# Altium PCB PCB1.PcbDoc
Units mm, origin at the board's own origin, x right, y up, seen from the top; angles counter-clockwise.
Board outline 24 x 17 mm, 4 copper layers (Top Layer, Int1 (GND), Int2 (PWR), Bottom Layer), stack 1.586 mm thick; 2 components, 14 nets, 48 pads, 22 vias.
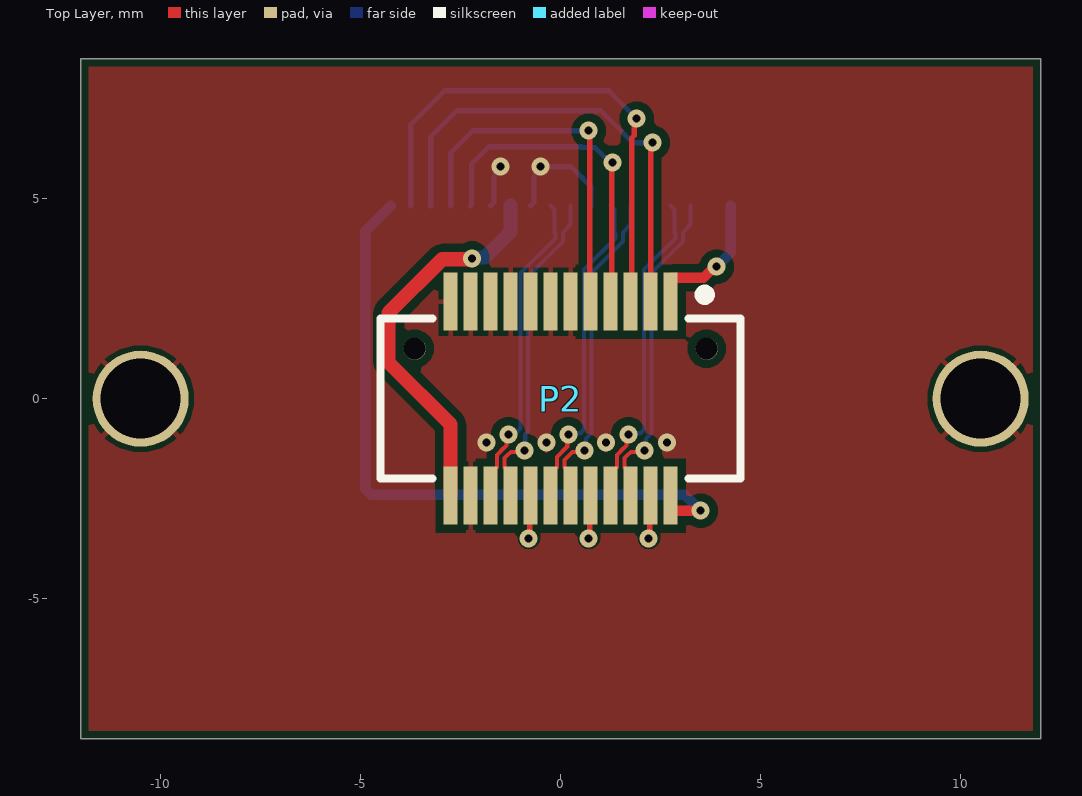
[diagram p0: Top Layer view]
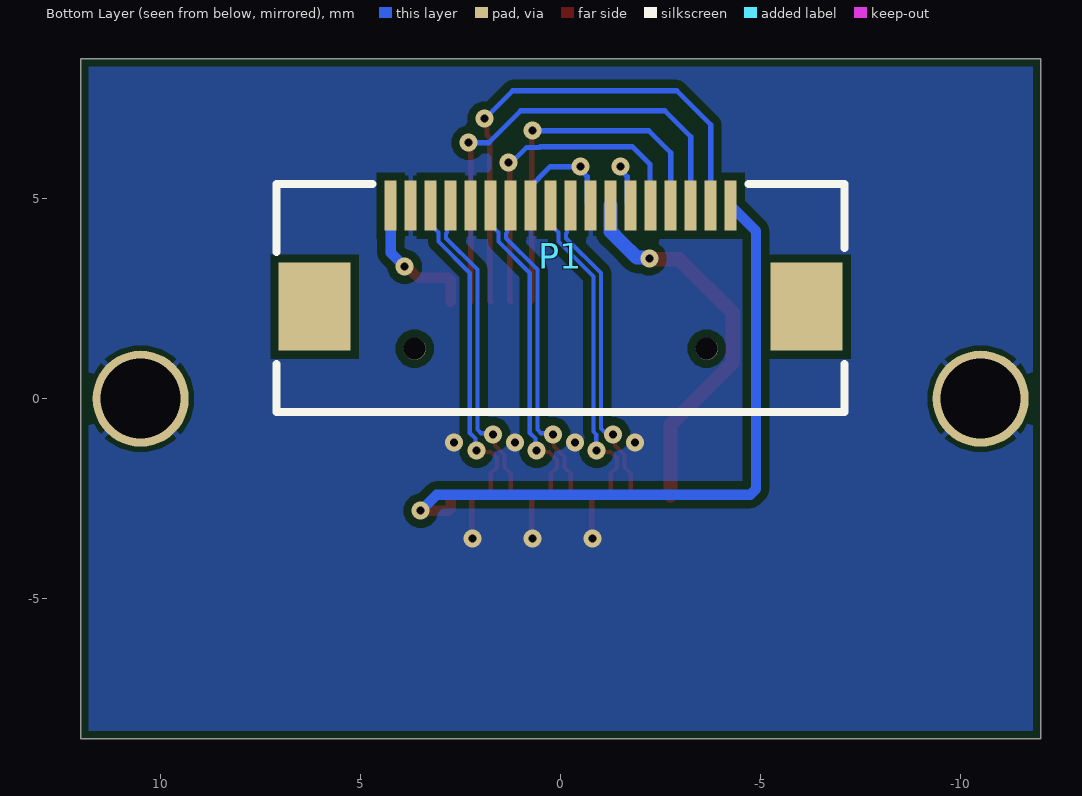
[diagram p1: Bottom Layer view, seen from below]
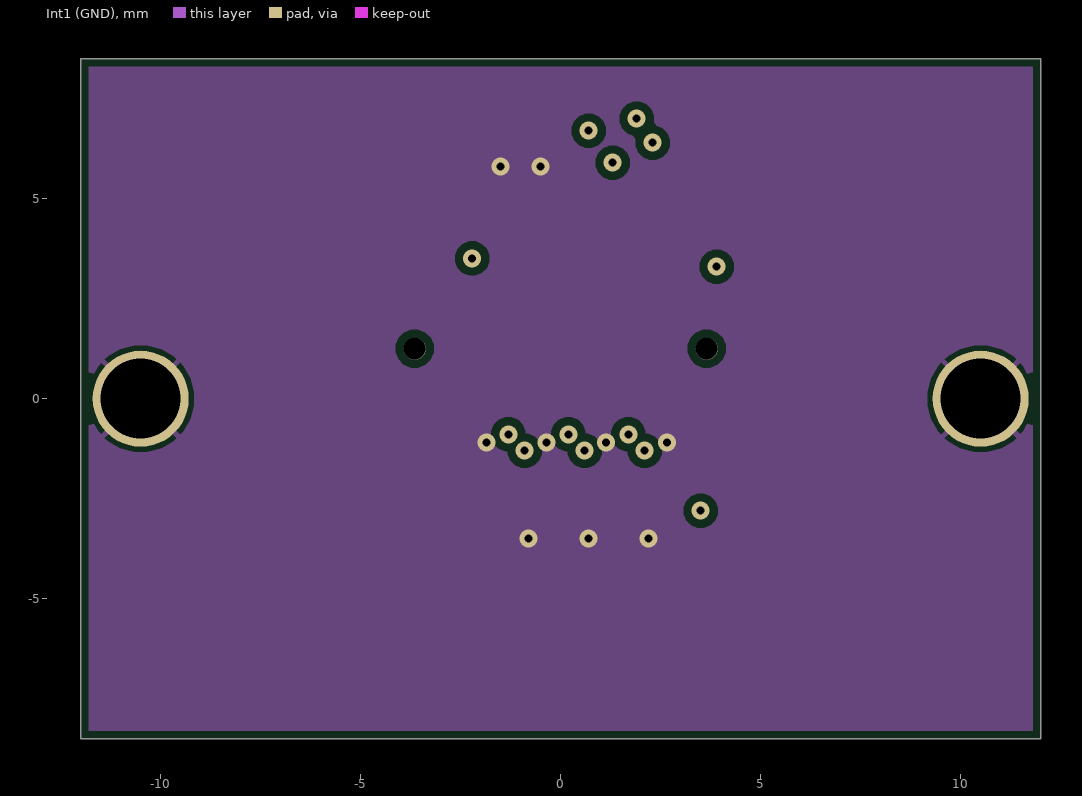
[diagram p2: Int1 (GND)]
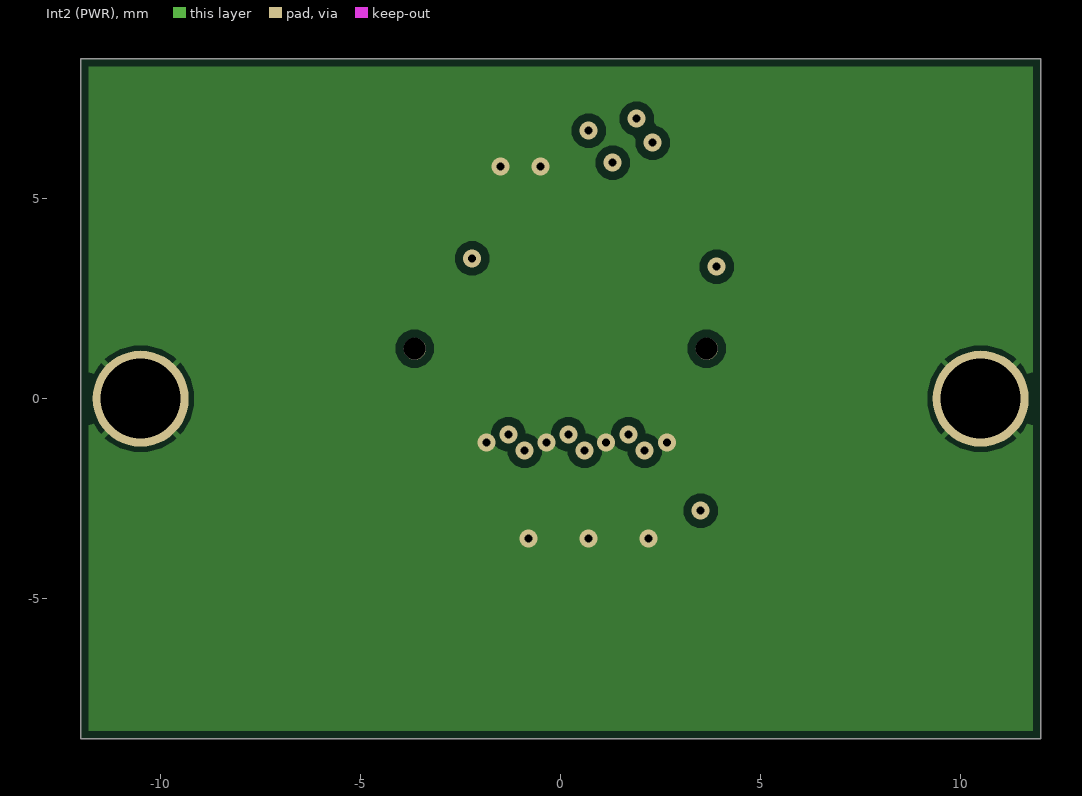
[diagram p3: Int2 (PWR)]

## Layer stack, top to bottom
Top Solder: solder mask 0.0152, SM-001, Dk 3.8
Top Layer: signal copper 0.035
Dielectric 1: prepreg 0.2104, PP-017, Dk 4.5
Int1 (GND): signal copper 0.0152
Dielectric 2: core 1.065, Core-039, Dk 4.48
Int2 (PWR): signal copper 0.0152
Dielectric 3: prepreg 0.2104, PP-017, Dk 4.5
Bottom Layer: signal copper 0.035
Bottom Solder: solder mask 0.0152, SM-001, Dk 3.8

## Board outline
-12,-8.5 12,-8.5 12,8.5 -12,8.5

## Design rules (kind name [scope] priority, off if disabled: settings)
BoardOutlineClearance [All] p1: gap=0.2 ignorepadtopadclearanceinfootprint=FALSE except(0.4: Arc-SplitBarrior Arc-SplitContinuation Track-SplitBarrior Track-SplitContinuation SMDPad-SplitBarrior SMDPad-SplitContinuation THPad-SplitBarrior THPad-SplitContinuation Via-SplitBarrior Via-SplitContinuation Fill-SplitBarrior Fill-SplitContinuation Poly-SplitBarrior Poly-SplitContinuation Region-SplitBarrior Region-SplitContinuation Text-SplitBarrior Text-SplitContinuation)
Clearance [All] p1: gap=0.2 ignorepadtopadclearanceinfootprint=FALSE except(0: Arc-Text Track-Text SMDPad-Text THPad-Text Via-Text Fill-Text Poly-Text Region-Text Text-Text; 0.089: Arc-Arc Arc-Track Arc-SMDPad Track-Track Track-SMDPad SMDPad-SMDPad; 0.127: Arc-Via Track-Via SMDPad-Via THPad-Via Via-Via)
DiffPairsRouting [InDifferentialPairClass('MIPI')] p1: maxlimit=0.127 minlimit=0.089 mostfreqgap=0.127 toplayer_maxgap=0.089 toplayer_prefgap=0.089 toplayer_minwidth=0.102 toplayer_maxwidth=0.102 toplayer_prefwidth=0.102 midlayer1_mingap=0.127 midlayer1_minwidth=0.11 midlayer1_maxwidth=0.11 midlayer1_prefwidth=0.11 midlayer2_mingap=0.127 midlayer2_minwidth=0.11 midlayer2_maxwidth=0.11 midlayer2_prefwidth=0.11 bottomlayer_maxgap=0.089 bottomlayer_prefgap=0.089 bottomlayer_minwidth=0.102 bottomlayer_maxwidth=0.102 bottomlayer_prefwidth=0.102 impedanceprofiledriven=TRUE impedanceprofileid={6F539A65-77A7-435E-BA13-085AFFFAEF97} impedanceprofilevalue=100.000000 maxuncoupledlength=12.7
HoleSize [All] p1: absolutevalues=TRUE maxlimit=6.3 minlimit=0.2 maxpercent=80.000 minpercent=20.000
MatchedLengths MatchedLengths_1 [InDifferentialPairClass('MIPI')] p1: tolerance=25.4 checknetsindiffpair=FALSE checkdiffpairvsdiffpair=TRUE checkxsignals=TRUE checkothers=TRUE usedelayunits=TRUE delaytolerance=1.000000
MatchedLengths [InDifferentialPairClass('MIPI')] p2: tolerance=25.4 checknetsindiffpair=TRUE checkdiffpairvsdiffpair=FALSE checkxsignals=FALSE checkothers=FALSE usedelayunits=TRUE delaytolerance=1.000000
MinimumAnnularRing [All] p1: minimumring=0.076
MinimumSolderMaskSliver [All] p1: minsoldermaskwidth=0.1
PlaneClearance [All] p1: clearance=0.127
PlaneConnect [All] p1: pad.planeconnectstyle=Relief pad.reliefexpansion=0.127 pad.reliefentries=4 pad.reliefconductorwidth=0.127 pad.reliefairgap=0.127 via.planeconnectstyle=Direct via.reliefexpansion=0.508 via.reliefentries=4 via.reliefconductorwidth=0.254 via.reliefairgap=0.254
PolygonConnect [All] p1: thpad.connectstyle=Relief thpad.reliefconductorwidth=0.127 thpad.reliefentries=4 thpad.polygonreliefangle="45 Angle" thpad.airgapwidth=0.127 smdpad.connectstyle=Relief smdpad.reliefconductorwidth=0.127 smdpad.reliefentries=4 smdpad.polygonreliefangle="90 Angle" smdpad.airgapwidth=0.127 via.connectstyle=Direct via.reliefconductorwidth=0.254 via.reliefentries=4 via.polygonreliefangle="90 Angle" via.airgapwidth=0.254
RoutingVias [All] p1: holewidth=0.2 width=0.3 viastyle="Through Hole" minholewidth=0.2 minwidth=0.3 maxholewidth=1 maxwidth=2 useviatemplates=TRUE viatemplateguid#1={A9D40BC6-23AC-4FE4-A60E-87127FBA82FB} viatemplatename#1=v45h20m0mx0(Tol13-8)
SilkToSilkClearance [All] p1: silktosilkclearance=0.15
SilkToSolderMaskClearance [IsPad] p1: minsilkscreentomaskgap=0.15 clearancetoexposedcopper=TRUE
SolderMaskExpansion [All] p1: expansion=0.102 istentingtop=FALSE
Width MIPI [InNet('MCSI-MCLK')] p1: maxlimit=0.351 minlimit=0.269 preferedwidth=0.351 toplayer_minwidth=0.351 midlayer1_maxwidth=0.269 midlayer1_prefwidth=0.269 midlayer2_maxwidth=0.269 midlayer2_prefwidth=0.269 bottomlayer_minwidth=0.351 impedanceprofiledriven=TRUE impedanceprofileid={0A58DF0A-4BE6-4814-BFCA-4E8F94834727} impedanceprofilevalue=50.000000 minimp=50.000000 maximp=50.000000 favimp=50.000000
Width [All] p2: maxlimit=2.54 minlimit=0.089 preferedwidth=0.089
23 further rules are at their usual default settings.

## Classes and differential pairs
differential pair class MIPI: MCSI-CK MCSI-D0 MCSI-D1
differential pair MCSI-D1: +MCSI-D1_P -MCSI-D1_N
differential pair MCSI-D0: +MCSI-D0_P -MCSI-D0_N
differential pair MCSI-CK: +MCSI-CK_P -MCSI-CK_N

## Components (designator, comment, footprint, x,y, rotation, side; value= is the part's Value field where it differs from the comment)
P1 "FPC 18pin 0.5" "FPC 18pin 0.5" 0,3.563 r180 bottom locked
P2 "Header 12X2A" "BTB 24PIN" 0,0 r270 top locked

## Footprints (in the part's own frame and the unit in brackets; to place one, negate y for a bottom-side part, rotate by r counter-clockwise, add the part's x,y. Pads: shape width x height; smd on the part's side, far side on the other; paste and mask are expansions set on the pad)
"BTB 24PIN" [mm] "OCN OK-208GF024-05"
  rect 1.45x0.35 smd: 1(-2.425,2.75) 2(-2.425,2.25) 3(-2.425,1.75) 4(-2.425,1.25) 5(-2.425,0.75) 6(-2.425,0.25) 7(-2.425,-0.25) 8(-2.425,-0.75) 9(-2.425,-1.25) 10(-2.425,-1.75) 11(-2.425,-2.25) 12(-2.425,-2.75) 13(2.425,-2.75) 14(2.425,-2.25) 15(2.425,-1.75) 16(2.425,-1.25) 17(2.425,-0.75) 18(2.425,-0.25) 19(2.425,0.25) 20(2.425,0.75) 21(2.425,1.25) 22(2.425,1.75) 23(2.425,2.25) 24(2.425,2.75)
  round 0.55 hole 0.55 unplated paste+0 mask+0: MH(-1.25,3.65) MH(-1.25,-3.65)
  silkscreen extent -2.73,-4.5 2,4.5, body extent -2,-4.5 2,4.5, height 3
"FPC 18pin 0.5" [mm] "HDGC 0.5K-DX-18PWB"
  rect 0.3x1.25 smd: 1(-4.25,1.262) 2(-3.75,1.262) 3(-3.25,1.262) 4(-2.75,1.262) 5(-2.25,1.262) 6(-1.75,1.262) 7(-1.25,1.262) 8(-0.75,1.262) 9(-0.25,1.262) 10(0.25,1.262) 11(0.75,1.262) 12(1.25,1.262) 13(1.75,1.262) 14(2.25,1.262) 15(2.75,1.262) 16(3.25,1.262) 17(3.75,1.262) 18(4.25,1.262)
  rect 1.8x2.2 smd: 19(-6.15,-1.262) 19(6.15,-1.262)
  silkscreen extent -7.1,-3.9 7.1,1.8, body extent -7.2,-4 7.2,1.2, height 2

## Part data
P2: "Header, 12-Pin, Dual row", LatestRevisionDate=17-Jul-2002, LatestRevisionNote="Re-released for DXP Platform.", Publisher="Altium Limited"

## Free pads (board coordinates)
  round 2.4 hole 2 paste+0: MH(-10.5,0) MH(10.5,0)

## Via types
v1: diameter 0.45, hole 0.2, Top Layer to Bottom Layer, tented both sides, 22 vias

## Nets (pads, with @x,y where several pads share a name; then routed paths per layer and width w, separated by ;. In a path a pad name is that pad's centre, name@x,y a point inside that pad or via, vN(x,y) a via of type N, cw(c..) or ccw(c..) an arc to the next point about the centre after c; other vN are vias at no path point)
1V8: P1.1 P2.1 | length 3.5
  Top Layer w0.254: P2.1 2.75,2.975 2.798,3.023 3.57,3.023 3.847,3.3 v1(3.9,3.3)
  Bottom Layer w0.254: v1(3.9,3.3) 4.25,3.65 P1.1
3V3: P1.18 P2.24 | length 17
  Top Layer w0.254: P2.24 2.75,-2.752 2.798,-2.8 v1(3.5,-2.8)
  Bottom Layer w0.254: P1.18 -4.885,4.19 -4.885,-2.251 -4.737,-2.4 3.1,-2.4 v1(3.5,-2.8)
GND: P1.2 P1.5 P1.8 P1.11 P1.13 P2.6 P2.7 P2.8 P2.9 P2.10 P2.11 P2.12 P2.14 P2.17 P2.20 P2.23 pad.MH | length 7.4
  Top Layer w0.127: v1(-0.8,-3.5) -0.775,-3.475 -0.775,-2.45 P2.17 ; v1(0.7,-3.5) 0.725,-3.475 0.725,-2.45 P2.20 ; v1(2.2,-3.5) 2.225,-3.475 2.225,-2.45 P2.23
  Bottom Layer w0.127: P1.13 -1.664,4.912 -1.664,5.549 -1.5,5.713 v1(-1.5,5.8) ; P1.11 -0.664,4.912 -0.664,5.549 -0.5,5.713 v1(-0.5,5.8) 0.266,5.8 0.553,5.513 0.553,5.497 0.75,5.3 P1.8
  other v1: -1.857,-1.089 -0.358,-1.089 1.138,-1.089 2.662,-1.089
MCSI-CK_N: P1.9 P2.16 | length 8.2
  Top Layer w0.102: P2.16 -1.25,-1.875 -1.405,-1.72 -1.405,-1.482 -1.345,-1.422 -1.34,-1.422 -1.246,-1.329 -0.929,-1.329 v1(-0.9,-1.3)
  Bottom Layer w0.102: v1(-0.9,-1.3) -0.888,-1.288 -0.888,-0.895 -0.815,-0.823 -0.815,3.058 0.059,3.933 0.059,4.161 0.249,4.35 P1.9
MCSI-CK_P: P1.10 P2.15 | length 8.1
  Top Layer w0.102: P2.15 -1.75,-1.875 -1.595,-1.72 -1.595,-1.403 -1.424,-1.231 -1.419,-1.231 -1.359,-1.172 -1.359,-0.943 v1(-1.308,-0.892)
  Bottom Layer w0.102: v1(-1.308,-0.892) -1.241,-0.825 -1.088,-0.825 -1.006,-0.744 -1.006,3.137 -0.132,4.012 -0.132,4.132 -0.152,4.153 -0.152,4.726 P1.10
MCSI-D0_N: P1.3 P2.22 | length 8.2
  Top Layer w0.102: P2.22 1.75,-1.875 1.595,-1.72 1.595,-1.482 1.655,-1.422 1.66,-1.422 1.754,-1.329 2.071,-1.329 v1(2.1,-1.3)
  Bottom Layer w0.102: v1(2.1,-1.3) 2.129,-1.271 2.129,-0.998 2.274,-0.853 2.274,3.148 3.059,3.933 3.059,4.161 3.249,4.35 P1.3
MCSI-D0_P: P1.4 P2.21 | length 8.1
  Top Layer w0.102: P2.21 1.25,-1.875 1.405,-1.72 1.405,-1.403 1.576,-1.231 1.581,-1.231 1.641,-1.172 1.641,-0.943 v1(1.692,-0.892)
  Bottom Layer w0.102: v1(1.692,-0.892) 1.721,-0.863 1.994,-0.863 2.083,-0.774 2.083,3.227 2.868,4.012 2.868,4.132 2.848,4.153 2.848,4.726 P1.4
MCSI-D1_N: P1.7 P2.18 | length 8.1
  Top Layer w0.102: P2.18 -0.25,-1.875 -0.095,-1.72 -0.095,-1.452 0.163,-1.194 0.163,-0.921 v1(0.192,-0.892)
  Bottom Layer w0.102: v1(0.192,-0.892) 0.221,-0.863 0.494,-0.863 0.583,-0.774 0.583,3.227 1.368,4.012 1.368,4.132 1.348,4.153 1.348,4.726 P1.7@1.249,4.825
MCSI-D1_P: P1.6 P2.19 | length 8.2
  Top Layer w0.102: P2.19 0.25,-1.875 0.095,-1.72 0.095,-1.532 0.298,-1.329 0.571,-1.329 v1(0.6,-1.3)
  Bottom Layer w0.102: v1(0.6,-1.3) 0.629,-1.271 0.629,-0.998 0.774,-0.853 0.774,3.148 1.559,3.933 1.559,4.161 1.749,4.35 P1.6@1.749,4.825
MCSI-MCLK: P1.12 P2.13 | length 9.8
  Top Layer w0.351: P2.13 -2.75,-0.648 -4.301,0.903 -4.301,2.148 -2.962,3.487 -2.234,3.487 v1(-2.215,3.506)
  Bottom Layer w0.351: v1(-2.215,3.506) -2.196,3.525 -1.902,3.525 -1.492,3.935 -1.49,3.935 -1.25,4.176 P1.12
MCSI-PWDN: P1.16 P2.2 | length 11.9
  Top Layer w0.127: P2.2 2.25,6.35 v1(2.3,6.4)
  Bottom Layer w0.127: P1.16 -3.25,6.55 -2.6,7.2 1,7.2 1.8,6.4 v1(2.3,6.4)
MCSI-RSTN: P1.17 P2.3 | length 13
  Top Layer w0.127: P2.3 1.775,2.45 1.775,6.521 1.839,6.585 1.839,6.939 v1(1.9,7)
  Bottom Layer w0.127: P1.17 -3.75,6.85 -2.9,7.7 1.2,7.7 v1(1.9,7)
TWI1-SCK: P1.14 P2.4 | length 8.4
  Top Layer w0.127: P2.4 1.275,2.45 1.275,5.875 v1(1.3,5.9)
  Bottom Layer w0.127: P1.14 -2.234,4.841 -2.234,5.861 -1.795,6.3 0.512,6.3 0.528,6.284 0.851,6.284 1.235,5.9 v1(1.3,5.9)
TWI1-SDA: P1.15 P2.5 | length 9.3
  Top Layer w0.127: v1(0.7,6.7) 0.725,6.675 0.725,2.45 P2.5
  Bottom Layer w0.127: P1.15 -2.75,6.15 -2.2,6.7 v1(0.7,6.7)
pads on no net: P1.19 P2.MH

## Polygon pours and split planes (outlines as drawn)
GND on Top Layer "GND_L01_P000" (solid, pour order 0): -12,-8.5 12,-8.5 12,8.5 -12,8.5
GND on Int1 (GND) "GND_L02_P001" (solid, pour order 1): -12,-8.5 12,-8.5 12,8.5 -12,8.5
GND on Int2 (PWR) "GND_L03_P002" (solid, pour order 2): -12,-8.5 12,-8.5 12,8.5 -12,8.5
GND on Bottom Layer "GND_L04_P003" (solid, pour order 3): -12,-8.5 12,-8.5 12,8.5 -12,8.5

## Silkscreen, mask and mechanical layers (free items; w line width, h text height)
Mechanical 1:
  the board outline again, w0.01